# Altium PCB ATRACK_KP_V1.PcbDoc (part 2 of 2)
Units mm, origin at the board's own origin, x right, y up, seen from the top; angles counter-clockwise.
Board outline 132 x 70 mm, 2 copper layers (TopLayer, BottomLayer); 246 components, 174 nets, 752 pads, 172 vias.
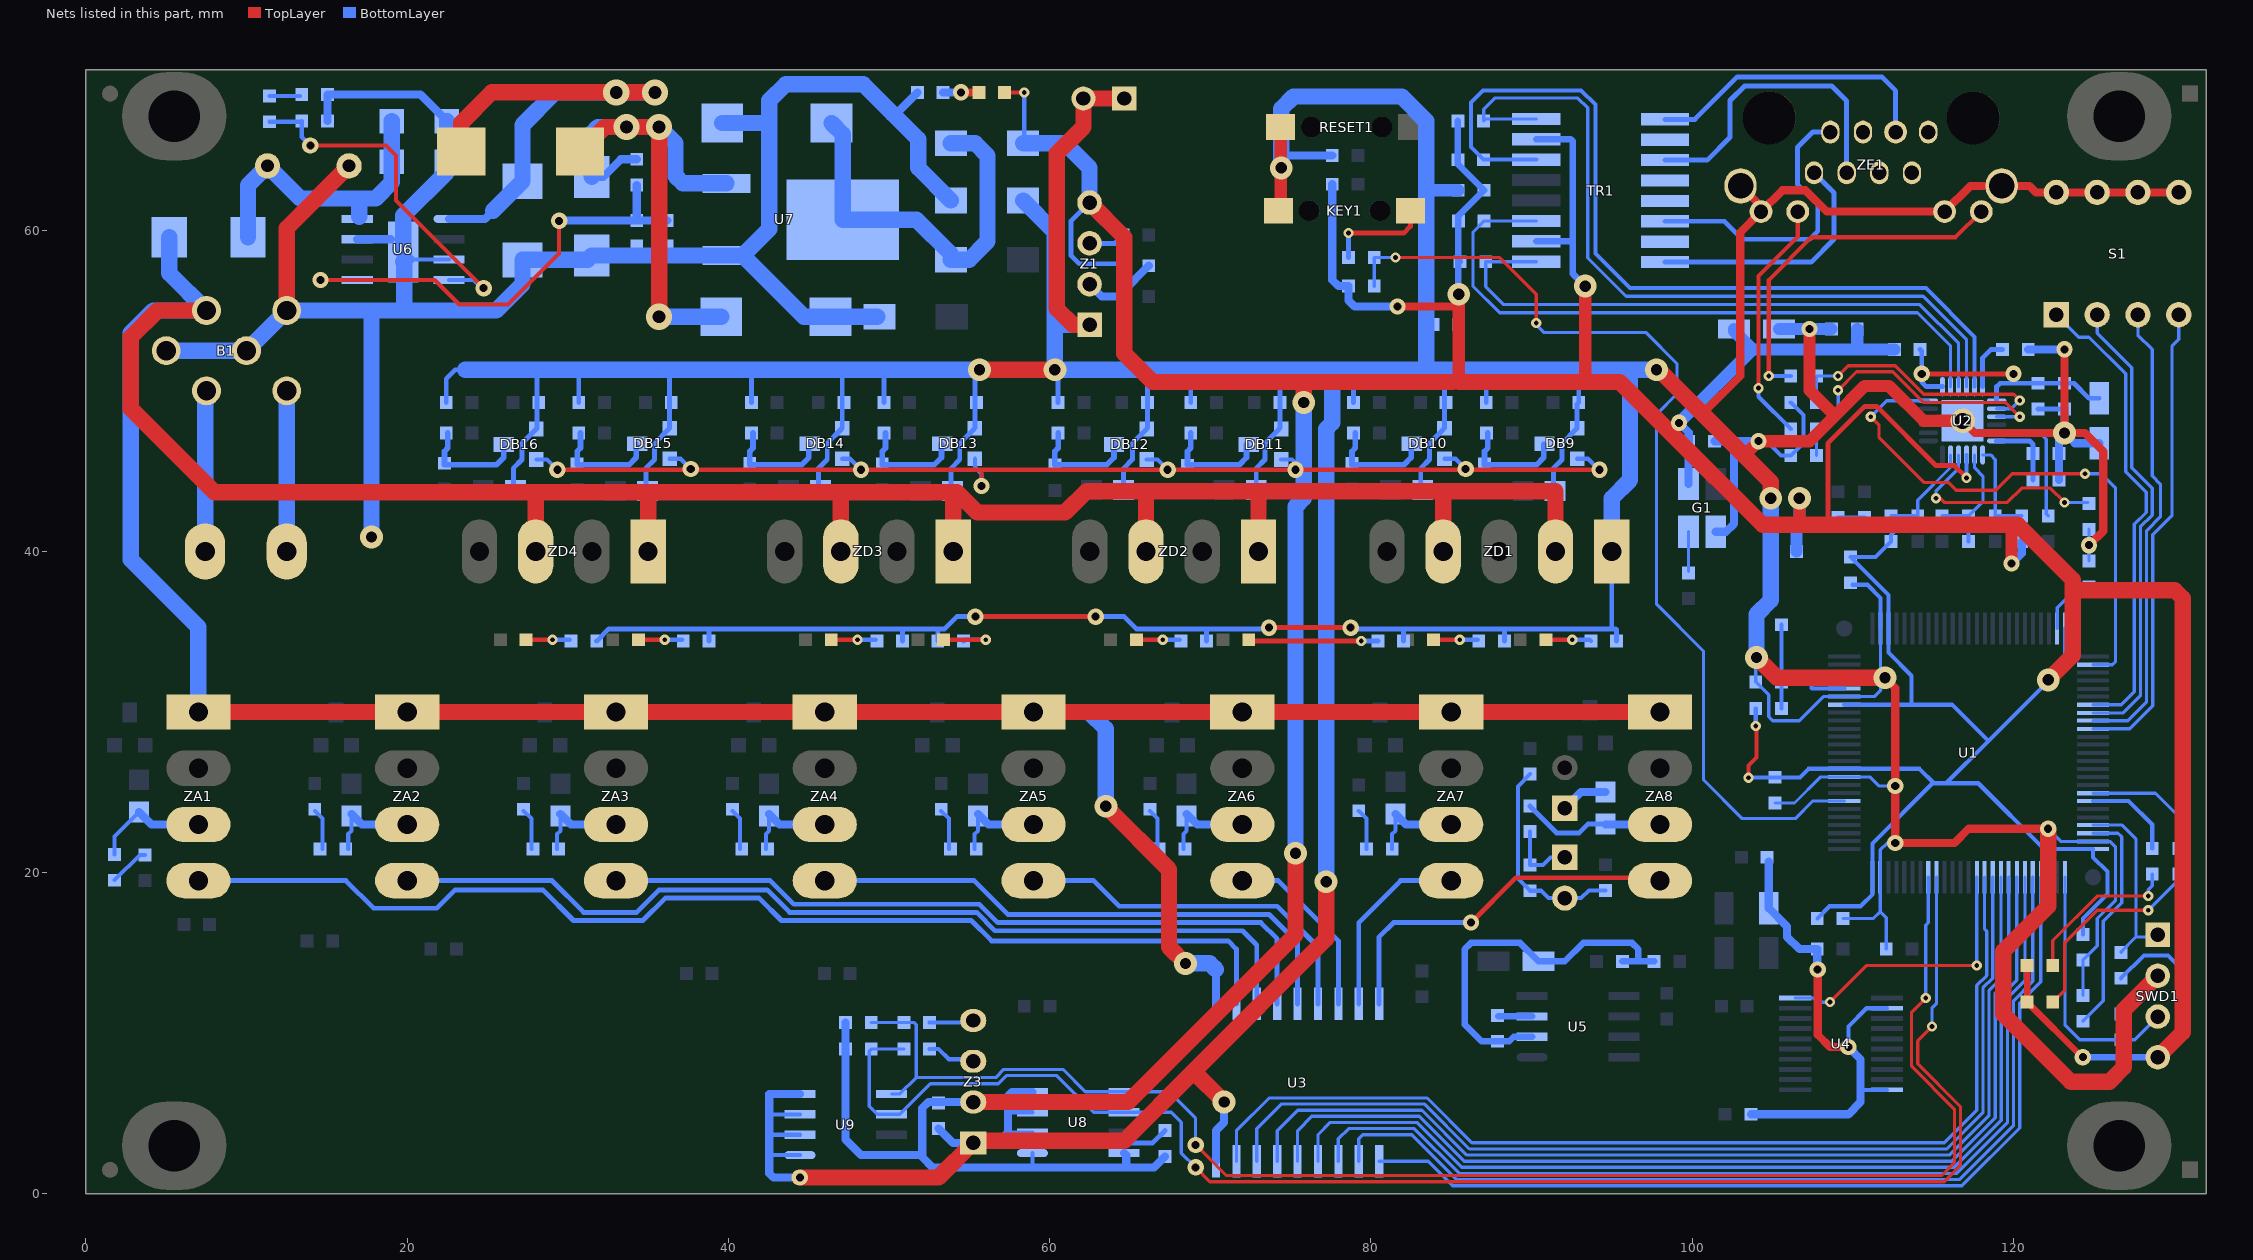
[diagram p2: the nets of this part, all layers, seen from the top]

## Via types
v1: diameter 0.635, hole 0.3, TopLayer to BottomLayer, tented both sides, 84 vias
v2: diameter 1.016, hole 0.5, TopLayer to BottomLayer, tented both sides, 60 vias
v3: diameter 1.422, hole 0.7, TopLayer to BottomLayer, tented both sides, 22 vias
v4: diameter 1.626, hole 0.8, TopLayer to BottomLayer, tented both sides, 5 vias
v5: diameter 1.524, hole 1, TopLayer to BottomLayer, tented both sides, 1 vias

## Nets (pads, with @x,y where several pads share a name; then routed paths per layer and width w, separated by ;. In a path a pad name is that pad's centre, name@x,y a point inside that pad or via, vN(x,y) a via of type N, cw(c..) or ccw(c..) an arc to the next point about the centre after c; other vN are vias at no path point) (continued)
E_TXD1: U1.52 U2.18 | length 34.6
  TopLayer w0.203: v1(111.125,48.387) 111.633,47.879 111.633,47.117 114.465,44.285 115.982,44.285 116.452,43.815 118.91,43.815 119.926,44.831 v1(124.46,44.831)
  BottomLayer w0.203: v1(111.125,48.387) 112.121,49.383 U2.18@114.715,49.383 ; v1(124.46,44.831) 125.476,44.831 126.365,43.942 126.365,33.147 126.162,32.944 U1.52@124.968,32.944
ELED1A: R27.1 ZE1.10 | length 15.4
  TopLayer w0.254: v1(104.14,50.165) 104.14,57.15 106.578,59.588 ZE1.10@106.578,61.158
  BottomLayer w0.254: v1(104.14,50.165) 104.14,49.63 R27.1@106.145,47.625
ELED2A: R28.1 ZE1.12 | length 22.3
  TopLayer w0.254: v1(104.775,50.927) 104.775,56.896 107.442,59.563 116.413,59.563 ZE1.12@118.008,61.158
  BottomLayer w0.254: v1(104.775,50.927) R28.1@106.145,50.927
ERX+: TR1.11 ZE1.3 | length 19.4
  BottomLayer w0.305: TR1.11@98.323,64.364 100.94,64.364 102.362,65.786 102.362,68.072 103.27,68.98 108.693,68.98 109.626,68.047 ZE1.3@109.626,63.571
ERX-: TR1.9 ZE1.6 | length 18.4
  BottomLayer w0.305: TR1.9@98.323,66.904 100.178,66.904 102.817,69.543 111.813,69.543 112.674,68.682 ZE1.6@112.674,66.111
ETH9: TR1.15
ETH10: TR1.10
ETH11: TR1.13
ETH12: TR1.12
ETH13: ZE1.4
ETH14: ZE1.5
ETH15: ZE1.7
ETH16: ZE1.8
ETX+: TR1.16 ZE1.1 | length 15.8
  BottomLayer w0.305: TR1.16@98.323,58.014 107.417,58.014 108.839,59.436 108.839,62.326 ZE1.1@107.594,63.571
ETX-: TR1.14 ZE1.2 | length 18.4
  BottomLayer w0.305: TR1.14@98.323,60.554 102.006,60.554 103.124,59.436 107.315,59.436 107.823,59.944 107.823,61.595 106.553,62.865 106.553,65.151 107.513,66.111 ZE1.2@108.61,66.111
GND: C1.2 C2.2 C3.1 C4.2 C5.1 C6.2 C7.2 C8.2 C9.2 C10.2 C11.2 C12.2 C13.1 C14.1 C15.1 C16.1 C17.1 C18.1 C19.1 C20.1 C21.1 C34.2 C35.2 C36.2 C37.2 C38.2 C39.2 C40.2 C41.2 C50.2 DB9.1 DB10.1 DB11.1 DB12.1 DB13.1 DB14.1 DB15.1 DB16.1 G1.2 GND1.1 GND1.2 KEY1.2 L4.2 R1.2 R5.1 R25.1 R30.1 R31.1 R32.1 R53.2 R54.2 R55.2 R57.2 R58.2 R59.2 R61.2 R62.2 R63.2 R65.2 R66.2 R67.2 R69.2 R70.2 R71.2 R73.2 R74.2 R75.2 R77.2 R78.2 R79.2 R81.2 R82.2 R83.2 RESET1.1 S1.5 S1.6 S1.7 S1.8 SWD1.2 U1.10 U1.20 U1.27 U1.74 U1.99 U2.25 U3.9 U8.2 U8.3 U8.4 U9.1 U9.2 U9.3 U9.4 Z1.1 Z3.1 ZD1.1 ZE1.9 ZE1.11 ZE1.G1 ZE1.G2 | length 688
  TopLayer w0.305: v2(55.372,35.941) v2(62.865,35.941) ; v2(73.66,35.255) 78.689,35.255 78.74,35.306 v2(78.74,35.255)
  TopLayer w0.508: 100.647,48.578 102.997,50.927 102.997,59.863 ZE1.9@104.292,61.158 ; ZE1.G2@103.022,62.758 104.292,61.488 ZE1.9@104.292,61.158 ; v3(112.014,32.131) 112.649,31.496 v2(112.649,25.4) v2(112.649,21.844) 116.332,21.844 117.221,22.733 v2(122.174,22.733) ; v5(116.84,48.133) 117.602,47.371 v3(123.19,47.371) ; v2(123.19,52.578) v3(123.19,47.371) ; v2@124.714,40.513 v2(124.714,40.386) 125.603,41.275 125.603,46.228 124.46,47.371 v3(123.19,47.371) ; S1.5@130.302,62.357 S1.6@127.762,62.357 S1.7@125.222,62.357 S1.8@122.682,62.357 121.412,62.357 121.011,62.758 ZE1.G1@119.278,62.758 117.322,62.758 ZE1.11@115.722,61.158 108.387,61.158 107.061,62.484 105.618,62.484 ZE1.9@104.292,61.158
  TopLayer w0.762: KEY1.2@74.259,61.214 74.386,61.341 RESET1.1@74.386,66.421 ; 103.251,45.974 v2(104.14,46.863) 107.315,46.863 108.902,48.451 ; v2(107.315,53.848) 107.315,50.038 108.902,48.451 ; v5(116.84,48.133) 114.427,48.133 112.268,50.292 110.744,50.292 108.902,48.451
  TopLayer w1.016: v2(44.45,1.016) 53.086,1.016 Z3.1@55.245,3.175 55.372,3.302 64.643,3.302 68.961,7.62 ; v3(55.626,51.308) v3(60.325,51.308) ; Z1.1@62.484,54.102 61.468,54.102 60.452,55.118 60.452,64.77 62.103,66.421 GND1.2@62.103,68.199 GND1.1@64.643,68.199 ; v3(70.866,5.715) 68.961,7.62 ; v3(77.216,19.431) 77.216,15.875 68.961,7.62 ; v3(97.79,51.308) 97.917,51.308 100.647,48.578 103.251,45.974 104.902,44.323 v3(104.902,43.307) ; v3(104.013,33.401) 105.283,32.131 v3(112.014,32.131) ; v2(122.174,22.733) 122.174,17.907 119.38,15.113 119.38,11.176 123.571,6.985 125.984,6.985 126.873,7.874 126.873,11.453 SWD1.2@129,13.58
  BottomLayer w0.203: C2.2@103.964,35.433 C1.2@103.964,31.877 104.775,31.066 104.775,29.718 105.029,29.464 106.68,29.464 108.179,30.963 U1.20@109.474,30.963 111.354,30.963 111.76,31.369 111.735,31.394 U1.27@111.735,35.204 ; C8.2@105.156,24.335 106.377,24.335 108.001,25.959 U1.10@109.474,25.959 111.074,25.959 111.633,25.4 v2(112.649,25.4) ; C7.2@109.396,17.145 111.277,17.145 111.709,17.577 ; R1.2@112.092,15.24 112.092,17.194 111.709,17.577 ; v2(112.649,21.844) 112.141,21.844 111.709,21.412 U1.99@111.709,19.71 111.709,17.577 ; v2(122.174,22.733) 122.961,21.946 U1.74@124.968,21.946 126.011,21.946 126.365,21.591 126.365,18.288 125.222,17.145 125.222,15.445 C6.2@124.333,14.556 C3.1@124.333,12.346 ; C5.1@124.714,39.397 v2(124.714,40.386) R32.1@124.714,41.375 ; R5.1@126.714,11.194 129,13.48 SWD1.2@129,13.58
  BottomLayer w0.254: 42.545,2.413 U9.1@44.45,2.413 ; 42.545,3.81 42.672,3.683 U9.2@44.45,3.683 ; 42.545,5.08 42.672,4.953 U9.3@44.45,4.953 ; 57.404,3.81 U8.2@58.928,3.81 ; 57.404,5.08 U8.3@58.928,5.08 ; v2(104.14,46.863) 104.648,46.863 105.537,45.974 R31.1@106.145,45.974 106.934,46.763 106.934,48.487 R30.1@106.145,49.276 ; C9.2@109.982,37.924 110.92,37.924 111.735,37.109 U1.27@111.735,35.204
  BottomLayer w0.305: C41.2@22.43,49.276 22.43,50.751 22.987,51.308 23.622,51.308 ; R82.2@26.609,43.815 26.609,45.178 27.151,45.72 27.151,46.736 DB16.1@28.04,47.625 ; DB16.1@28.089,47.674 28.089,51.203 ; C40.2@30.685,49.276 30.685,51.259 ; R83.2@31.799,34.417 32.561,35.179 53.086,35.179 ; R78.2@34.864,43.815 34.864,45.178 35.406,45.72 35.406,46.736 DB15.1@36.295,47.625 ; DB15.1@36.344,47.674 36.344,51.203 ; R79.2@38.784,34.417 38.784,35.101 ; C39.2@41.43,49.276 41.43,51.28 ; R74.2@45.609,43.815 45.609,45.178 46.151,45.72 46.151,46.736 DB14.1@47.04,47.625 ; DB14.1@47.089,47.674 47.089,51.28 ; C38.2@49.685,49.276 49.685,51.28 ; R75.2@50.849,34.417 50.849,35.13 ; R71.2@53.037,34.417 53.037,35.13 53.086,35.179 ; R70.2@53.864,43.815 53.864,45.178 54.406,45.72 54.406,46.736 DB13.1@55.295,47.625 ; DB13.1@55.344,47.674 55.344,51.026 v3(55.626,51.308) ; v2(55.372,35.941) 54.229,35.941 53.467,35.179 53.086,35.179 ; 56.769,3.175 66.421,3.175 C50.2@67.183,3.937 ; v3(60.325,51.308) 60.53,51.103 C37.2@60.53,49.276 ; v2(62.865,35.941) 64.643,35.941 65.405,35.179 v2@73.584,35.179 ; R66.2@64.609,43.815 64.609,45.178 65.151,45.72 65.151,46.736 DB12.1@66.04,47.625 ; DB12.1@66.089,47.674 R65.2@66.089,49.276 66.089,51.23 ; C36.2@68.785,49.276 68.785,51.132 ; R67.2@69.772,34.417 69.772,35.101 ; R62.2@72.864,43.815 72.864,45.178 73.406,45.72 73.406,46.736 DB11.1@74.295,47.625 ; DB11.1@74.344,47.674 R61.2@74.344,49.276 74.344,51.23 ; v2@78.74,35.179 94.996,35.179 ; C35.2@78.93,49.276 78.93,51.244 ; R63.2@82.042,34.417 82.042,35.13 ; R58.2@83.109,43.815 83.109,45.178 83.651,45.72 83.651,46.736 DB10.1@84.54,47.625 ; DB10.1@84.589,47.674 84.589,51.301 ; C34.2@87.185,49.276 87.185,51.244 ; R59.2@88.314,34.417 88.314,35.101 ; R54.2@91.364,43.815 91.364,45.178 91.906,45.72 91.906,46.736 DB9.1@92.795,47.625 ; DB9.1@92.844,47.674 92.844,49.176 R53.2@92.944,49.276 92.944,51.288 92.964,51.308 ; ZD1.1@95,40 95,35.183 94.996,35.179 ; R55.2@95.299,34.417 95.299,35.13 95.25,35.179 94.996,35.179 ; C16.1@121.539,48.868 C15.1@123.19,48.868
  BottomLayer w0.508: v2(44.45,1.016) 42.799,1.016 42.545,1.27 42.545,2.413 42.545,3.81 42.545,5.08 42.545,6.223 U9.4@44.45,6.223 ; C11.2@53.086,4.064 53.975,3.175 Z3.1@55.245,3.175 56.769,3.175 57.404,3.81 57.404,5.08 57.404,6.096 57.658,6.35 U8.4@58.928,6.35 ; U3.9@70.358,2.032 70.358,3.937 70.866,4.445 v3(70.866,5.715) ; 74.422,64.643 C4.2@77.597,64.643 ; C12.2@101.395,46.863 102.616,46.863 ; G1.2@101.473,41.224 102.121,41.224 102.616,41.72 102.616,46.863 ; v2(104.14,46.863) 102.616,46.863 ; R25.1@120.931,52.578 v2(123.19,52.578) ; C18.1@122.836,44.45 C20.1@122.836,46.101 122.836,47.017 v3(123.19,47.371) ; C15.1@123.19,48.868 v3(123.19,47.371) ; C17.1@125.349,46.736 123.825,46.736 v3(123.19,47.371)
  BottomLayer w0.762: 83.439,62.484 C14.1@85.444,62.484 ; C21.1@105.41,53.848 v2(107.315,53.848) C19.1@108.685,53.848
  BottomLayer w1.016: 23.622,51.308 v3(55.626,51.308) ; L4.2@58.348,61.849 60.325,59.872 60.325,54.102 ; Z1.1@62.484,54.102 60.325,54.102 ; v3(74.422,63.881) 74.422,64.643 74.422,67.564 75.184,68.326 81.915,68.326 83.439,66.802 83.439,62.484 83.439,51.308 ; v3(77.216,19.431) 77.216,47.625 77.597,48.006 77.597,51.308 ; ZD1.1@95,40 95,43.311 96.139,44.45 96.139,51.308 ; v3(97.79,51.308) 96.139,51.308 ; v3(104.013,33.401) 104.013,36.068 104.902,36.957 C10.2@104.902,40 v3(104.902,43.307) ; 60.325,54.102 v3(60.325,51.308) 77.597,51.308 ; 77.597,51.308 83.439,51.308 ; 83.439,51.308 92.964,51.308 96.139,51.308
GND_Z: B1.CG1 B1.CG2 B1.CG3 C42.1 C44.2 C45.1 C46.1 C47.1 C48.1 C49.1 D2.A L4.1 L6.1 R13.2 R85.2 R86.2 R87.2 U6.3 U6.7 U6.9 U7.1 | length 133.8
  TopLayer w1.016: B1.CG1@12.5,55 12.5,60.125 C42.1@16.383,64.008
  BottomLayer w0.254: U6.9@20.244,58.166 U6.3@22.606,58.166
  BottomLayer w0.508: C44.2@15.035,66.802 R87.2@15.035,68.453 20.819,68.453 C47.1@22.476,66.797 ; U6.7@16.891,59.436 U6.9@18.974,59.436 ; U6.9@19.761,57.353 19.761,58.039 U6.9@19.761,58.649 U6.9@20.244,58.166 ; 50.228,67.247 50.434,67.247 R13.2@51.767,68.58
  BottomLayer w1.016: B1.CG3@5,52.5 B1.CG2@10,52.5 B1.CG1@12.5,55 17.78,55 ; v3(17.78,40.894) 17.78,55 ; U6.9@19.555,58.855 U6.9@19.761,58.649 19.761,60.909 22.476,63.624 C46.1@22.476,64.257 C47.1@22.476,66.797 ; U6.9@19.761,58.039 19.812,57.988 19.812,55 ; D2.A@27.178,58.147 27.178,56.642 25.536,55 19.812,55 ; D2.A@27.178,58.166 31.242,58.166 C45.1@31.496,58.42 36.195,58.42 U7.1@39.878,58.42 U7.1@40.894,58.42 ; C49.1@39.624,66.675 42.545,66.675 ; L6.1@49.276,54.61 C48.1@46.355,54.61 44.704,54.61 U7.1@40.894,58.42 ; L4.1@53.848,61.849 51.816,63.881 51.816,65.659 50.228,67.247 48.387,69.088 43.561,69.088 42.545,68.072 42.545,66.675 ; 17.78,55 19.812,55 ; U7.1@40.894,58.42 42.545,60.071 42.545,66.675
JP1: S1.1 U1.57 | length 29.4
  BottomLayer w0.203: S1.1@122.682,54.737 124.079,53.34 124.714,53.34 127,51.054 127,44.958 128.27,43.688 128.27,42.423 127.533,41.687 127.533,31.267 126.721,30.455 U1.57@124.968,30.455
JP2: S1.2 U1.58 | length 28.8
  BottomLayer w0.203: U1.58@124.968,29.947 126.848,29.947 127.914,31.013 127.914,41.529 128.651,42.266 128.651,43.942 127.381,45.212 127.381,51.435 125.222,53.594 S1.2@125.222,54.737
JP3: S1.3 U1.59 | length 28.9
  BottomLayer w0.203: U1.59@124.968,29.464 127.127,29.464 128.295,30.632 128.295,41.3 129.159,42.164 129.159,44.196 128.651,44.704 128.651,52.578 127.762,53.467 S1.3@127.762,54.737
JP4: S1.4 U1.60 | length 29.3
  BottomLayer w0.203: U1.60@124.968,28.956 127.254,28.956 128.676,30.378 128.676,41.046 129.883,42.253 129.883,52.794 130.302,53.213 S1.4@130.302,54.737
KY1: F1.2 R12.1 U1.7 | length 62.5
  TopLayer w0.203: v1(81.534,58.293) 88.011,58.293 90.297,56.007 v1(90.297,54.229)
  BottomLayer w0.203: R12.1@80.213,56.515 F1.2@80.213,58.293 v1(81.534,58.293) ; v1(90.297,54.229) 90.17,54.229 90.767,53.632 97.117,53.632 99.06,51.689 99.06,49.815 97.79,48.545 97.79,36.703 100.711,33.782 100.711,25.781 103.124,23.368 106.426,23.368 107.518,24.46 U1.7@109.474,24.46
LED1: R10.2 U1.69 | length 5.8
  BottomLayer w0.254: U1.69@124.968,24.46 127.178,24.46 128.651,22.987 R10.2@128.651,21.512
LED2: R11.2 U1.68 | length 7.9
  BottomLayer w0.203: U1.68@124.968,24.943 128.854,24.943 130.302,23.495 R11.2@130.302,21.512
NetB1_B: B1.B Z2.2 | length 9.9
  BottomLayer w1.016: Z2.2@7.42,40 B1.B@7.42,49.92
NetB1_PSG: B1.PSG Z2.1 | length 10
  BottomLayer w1.016: Z2.1@12.5,40 B1.PSG@12.5,50
NetC1_1: C1.1 C2.1 R4.1 U1.21 U1.22 | length 11.7
  BottomLayer w0.254: R4.1@105.564,30.226 C1.1@105.564,31.877 ; C2.1@105.564,35.433 C1.1@105.564,31.877 ; U1.21@109.474,31.471 107.467,31.471 107.442,31.496 107.442,31.877 107.518,31.953 ; U1.22@109.474,31.953 107.518,31.953 ; C1.1@105.564,31.877 105.64,31.953 107.518,31.953
NetC3_2: C3.2 U1.73 | length 14.4
  BottomLayer w0.203: C3.2@124.333,10.746 125.603,12.016 125.603,16.987 126.746,18.13 126.746,22.225 126.517,22.454 U1.73@124.968,22.454
NetC5_2: C5.2 U1.49 | length 3.8
  BottomLayer w0.203: U1.49@122.733,35.204 122.733,36.5 124.03,37.797 C5.2@124.714,37.797
NetC15_2: C15.2 C16.2 C17.2 L1.1 U2.1 U2.19 | length 17.5
  TopLayer w0.305: v2(114.3,51.054) v2(120.015,51.054)
  BottomLayer w0.305: L1.1@114.2,52.578 114.3,52.478 v2(114.3,51.054) 114.3,50.546 114.588,50.258 U2.19@115.59,50.258 ; U2.1@118.965,49.383 118.965,50.258 119.175,50.468 120.015,50.468 ; v2(120.015,51.054) 120.015,50.468 ; C17.2@125.349,49.536 124.708,49.536 123.776,50.468 C15.2@123.19,50.468 C16.2@121.539,50.468 120.015,50.468
NetC18_2: C18.2 C20.2 U2.6 | length 4.6
  BottomLayer w0.305: U2.6@118.965,46.883 121.011,46.883 121.236,46.658 C20.2@121.236,46.101 C18.2@121.236,44.45
NetC25_1: C25.1 C26.1 CX1.2 F6.1 U4.12 U4.20 | length 31.6
  TopLayer w0.508: v2(107.823,13.97) 107.823,9.906 108.585,9.144 v2(109.728,9.144)
  BottomLayer w0.254: v2(109.728,9.144) 109.728,10.414 110.871,11.557 U4.12@112.141,11.557 ; 110.49,6.477 U4.20@112.141,6.477
  BottomLayer w0.508: C25.1@103.659,4.953 109.728,4.953 110.49,5.715 110.49,6.477 110.49,8.382 v2(109.728,9.144) ; F6.1@104.775,20.674 CX1.2@104.775,17.786 105.918,16.643 105.918,16.002 106.68,15.24 C26.1@107.796,15.24 107.796,13.997 v2(107.823,13.97)
NetC30_1: C30.1 CX2.2 F10.1 R47.1 U5.2 | length 24.2
  BottomLayer w0.406: U5.2@90.043,9.779 88.9,9.779 88.619,9.498 86.895,9.498 85.852,10.541 85.852,15.24 86.233,15.621 89.287,15.621 CX2.2@90.43,14.478 92.075,14.478 93.218,15.621 96.266,15.621 96.647,15.24 96.647,14.478 ; C30.1@95.658,14.478 96.647,14.478 ; F10.1@97.636,14.478 96.647,14.478
NetC42_2: C42.2 C46.2 C47.2 D1.K U6.8 | length 18.9
  BottomLayer w1.016: D1.K@10.088,59.563 10.088,62.793 C42.2@11.303,64.008 13.335,61.976 17.018,61.976 ; U6.8@17.018,60.833 17.018,61.976 ; C47.2@19.047,66.797 C46.2@19.047,64.257 19.047,62.989 18.034,61.976 17.018,61.976
NetC43_1: C43.1 R87.1 | length 1.9
  BottomLayer w0.254: C43.1@11.43,68.353 R87.1@13.335,68.353
NetC43_2: C43.2 C44.1 U6.4 | length 22.8
  TopLayer w0.254: v2(13.97,65.278) 18.669,65.278 19.304,64.643 19.304,61.849 v2(24.765,56.388) v2@24.765,56.769
  BottomLayer w0.254: C43.2@11.43,66.753 13.386,66.753 C44.1@13.435,66.802 13.435,65.813 v2(13.97,65.278) ; U6.4@22.606,56.896 24.13,56.896 24.765,56.261 v2(24.765,56.388)
NetC49_2: C49.2 L3.1 L5.1 U7.2 | length 24.6
  BottomLayer w1.016: C49.2@46.424,66.675 47.117,65.982 U7.2@47.117,60.655 51.717,60.655 L5.1@53.811,58.56 ; L5.1@53.848,58.166 54.991,58.166 56.134,59.309 56.134,64.643 55.372,65.405 L3.1@53.848,65.405
NetD2_K: D2.K L2.1 U6.1 | length 32.8
  TopLayer w1.016: L2.1@23.368,64.897 23.368,66.675 25.273,68.58 v4(35.433,68.58)
  BottomLayer w0.508: U6.1@22.606,60.706 24.837,60.706 25.345,61.214
  BottomLayer w1.016: 25.345,61.214 D2.K@27.178,63.047 27.178,66.548 29.21,68.58 v4(35.433,68.58)
  other v4: 33.02,68.58
NetDB9_3: DB9.3 F12.2 R52.2 | length 6.8
  BottomLayer w0.356: F12.2@87.285,47.371 87.285,46.433 87.08,46.228 87.08,45.388 90.304,45.388 90.763,45.847 DB9.3@90.763,46.66
NetDB10_3: DB10.3 F13.2 R56.2 | length 6.8
  BottomLayer w0.356: F13.2@79.03,47.371 79.03,46.433 78.825,46.228 78.825,45.388 82.049,45.388 82.508,45.847 DB10.3@82.508,46.66
NetDB11_3: DB11.3 F14.2 R60.2 | length 6.8
  BottomLayer w0.356: F14.2@68.785,47.371 68.785,46.433 68.58,46.228 68.58,45.388 71.804,45.388 72.263,45.847 DB11.3@72.263,46.66
NetDB12_3: DB12.3 F15.2 R64.2 | length 6.8
  BottomLayer w0.356: F15.2@60.53,47.371 60.53,46.433 60.325,46.228 R64.2@60.325,45.388 63.549,45.388 64.008,45.847 DB12.3@64.008,46.66
NetDB13_3: DB13.3 F16.2 R68.2 | length 6.8
  BottomLayer w0.356: F16.2@49.785,47.371 49.785,46.433 49.58,46.228 49.58,45.388 52.804,45.388 53.263,45.847 DB13.3@53.263,46.66
NetDB14_3: DB14.3 F17.2 R72.2 | length 6.8
  BottomLayer w0.356: F17.2@41.53,47.371 41.53,46.433 41.325,46.228 41.325,45.388 44.549,45.388 45.008,45.847 DB14.3@45.008,46.66
NetDB15_3: DB15.3 F18.2 R76.2 | length 6.8
  BottomLayer w0.356: F18.2@30.785,47.371 30.785,46.433 30.58,46.228 30.58,45.388 33.804,45.388 34.263,45.847 DB15.3@34.263,46.66
NetDB16_3: DB16.3 F19.2 R80.2 | length 6.8
  BottomLayer w0.356: F19.2@22.53,47.371 22.53,46.433 22.325,46.228 22.325,45.388 25.549,45.388 26.008,45.847 DB16.3@26.008,46.66
NetDL1_K: DL1.K R83.1 | length 2.7
  TopLayer w0.305: DL1.K@27.4,34.5 v1(29.039,34.5)
  BottomLayer w0.305: v1(29.039,34.5) R83.1@30.116,34.5
NetDL2_K: DL2.K R79.1 | length 2.7
  TopLayer w0.305: DL2.K@34.4,34.5 v1(36.039,34.5)
  BottomLayer w0.305: v1(36.039,34.5) R79.1@37.101,34.5
NetDL3_K: DL3.K R75.1 | length 2.8
  TopLayer w0.305: DL3.K@46.4,34.5 v1(48.039,34.5)
  BottomLayer w0.305: v1(48.039,34.5) R75.1@49.166,34.5
NetDL4_K: DL4.K R71.1 | length 4
  TopLayer w0.305: DL4.K@53.4,34.5 v1(56.024,34.5)
  BottomLayer w0.305: R71.1@54.637,34.417 54.72,34.5 v1(56.024,34.5)
NetDL5_K: DL5.K R67.1 | length 2.7
  TopLayer w0.305: DL5.K@65.4,34.5 v1(67.039,34.5)
  BottomLayer w0.305: v1(67.039,34.5) R67.1@68.089,34.5
NetDL6_K: DL6.K R63.1 | length 8.1
  TopLayer w0.305: DL6.K@72.4,34.5 72.483,34.417 v1(79.407,34.417)
  BottomLayer w0.305: v1(79.407,34.417) R63.1@80.442,34.417
NetDL7_K: DL7.K R59.1 | length 2.7
  TopLayer w0.305: DL7.K@83.9,34.5 v1(85.539,34.5)
  BottomLayer w0.305: v1(85.539,34.5) R59.1@86.631,34.5
NetDL8_K: DL8.K R55.1 | length 2.8
  TopLayer w0.305: DL8.K@90.9,34.5 v1(92.539,34.5)
  BottomLayer w0.254: v1(92.539,34.5) 93.616,34.5 R55.1@93.699,34.417
NetF1_1: F1.1 KEY1.1 | length 6.5
  TopLayer w0.305: v1(78.613,59.817) 82.042,59.817 82.459,60.234 KEY1.1@82.459,61.214
  BottomLayer w0.305: F1.1@78.613,58.293 v1(78.613,59.817)
NetF2_1: F2.1 R33.1 | length 2.6
  BottomLayer w0.254: F2.1@1.778,19.531 3.356,21.109 R33.1@3.683,21.109
NetF3_1: F3.1 R35.1 | length 2.6
  BottomLayer w0.254: R35.1@14.248,23.849 14.729,23.368 F3.1@14.729,21.463
NetF4_1: F4.1 R37.1 | length 2.6
  BottomLayer w0.254: R37.1@27.248,23.849 27.729,23.368 F4.1@27.729,21.463
NetF5_1: F5.1 R39.1 | length 2.6
  BottomLayer w0.254: R39.1@40.248,23.849 40.729,23.368 F5.1@40.729,21.463
NetF7_1: F7.1 R41.1 | length 2.6
  BottomLayer w0.254: R41.1@53.248,23.849 53.729,23.368 F7.1@53.729,21.463
NetF8_1: F8.1 R43.1 | length 2.6
  BottomLayer w0.254: R43.1@66.248,23.849 66.729,23.368 F8.1@66.729,21.463
NetF9_1: F9.1 R45.1 | length 2.6
  BottomLayer w0.254: R45.1@79.248,23.849 79.729,23.368 F9.1@79.729,21.463
NetF11_1: F11.1 JP1.1 R48.1 | length 4.4
  BottomLayer w0.254: F11.1@89.916,22.552 R48.1@89.916,20.474 90.705,20.474 91.186,20.955 JP1.1@92.075,20.955
NetF20_1: F20.1 Z3.3 | length 3
  BottomLayer w0.254: F20.1@52.527,9.017 53.086,9.017 53.721,8.382 55.118,8.382 Z3.3@55.245,8.255
NetF21_1: F21.1 Z3.4 | length 2.8
  BottomLayer w0.254: F21.1@52.527,10.668 55.118,10.668 Z3.4@55.245,10.795
NetG1_3: G1.3 R2.1 | length 2.5
  BottomLayer w0.203: R2.1@99.771,38.762 G1.3@99.771,41.224
NetJP1_2: JP1.2 R48.2 R49.1 R50.1 | length 13
  BottomLayer w0.254: R50.1@89.916,26.135 89.154,25.373 89.154,19.636 R48.2@89.916,18.874 ; R48.2@89.938,18.896 R48.2@89.916,18.874 ; R49.1@94.615,18.896 93.572,18.896 93.091,18.415 JP1.2@92.075,18.415 91.059,18.415 90.6,18.874 R48.2@89.916,18.874
NetJP2_1: JP2.1 R51.1 | length 3
  BottomLayer w0.508: JP2.1@92.075,24.003 93.093,25.021 R51.1@94.615,25.021
NetLD1_K: LD1.K R10.1 | length 10.1
  TopLayer w0.203: LD1.K@122.455,14.224 122.455,15.775 125.222,18.542 v1(128.397,18.542)
  BottomLayer w0.203: v1(128.397,18.542) 128.397,18.923 128.651,19.177 R10.1@128.651,19.912
NetLD2_K: LD2.K R11.1 | length 13.1
  TopLayer w0.203: LD2.K@122.455,11.938 123.19,12.673 123.19,15.621 125.222,17.653 v1(128.397,17.653)
  BottomLayer w0.203: v1(128.397,17.653) 130.302,19.558 R11.1@130.302,19.912
NetLD3_K: LD3.K R13.1 | length 2.2
  TopLayer w0.508: v2(54.483,68.58) LD3.K@55.599,68.58
  BottomLayer w0.508: R13.1@53.367,68.58 v2(54.483,68.58)
NetR6_1: R6.1 Z1.3 | length 2.3
  BottomLayer w0.305: Z1.3@62.484,59.182 64.059,59.182 R6.1@64.567,59.69
NetR7_1: R7.1 R92.1 Z1.2 | length 5
  BottomLayer w0.508: Z1.2@62.484,56.642 63.246,55.88 R7.1@64.567,55.88 64.567,56.185 R92.1@66.167,57.785
NetR17_2: R17.2 R23.2 U2.8 | length 6
  BottomLayer w0.203: R23.2@115.57,42.213 R17.2@117.221,42.213 118.11,43.102 118.11,44.692 117.59,45.212 U2.8@117.59,46.008
NetR18_2: R18.2 R26.2 U2.11 | length 6.3
  BottomLayer w0.203: R18.2@112.395,42.213 R26.2@114.046,42.213 ; R26.2@114.043,42.216 R26.2@114.046,42.213 ; U2.11@116.09,46.008 116.09,45.224 114.046,43.18 R26.2@114.046,42.213
NetR20_2: R20.2 R24.2 U2.7 | length 6.1
  BottomLayer w0.203: U2.7@118.09,46.008 118.584,46.008 118.872,45.72 R24.2@118.872,42.213 R20.2@120.523,42.213
NetR25_2: R25.2 U2.24 | length 3.3
  BottomLayer w0.305: U2.24@118.09,50.258 118.09,52.05 118.618,52.578 R25.2@119.331,52.578
NetR27_2: R27.2 R31.2 U2.3 | length 19
  TopLayer w0.203: v1(109.093,50.038) 110.236,51.181 112.491,51.181 114.396,49.276 119.507,49.276 v1(120.396,48.387)
  BottomLayer w0.203: R31.2@107.745,45.974 R27.2@107.745,47.625 109.093,48.973 v1(109.093,50.038) ; U2.3@118.965,48.383 120.392,48.383 v1(120.396,48.387)
NetR28_2: R28.2 R30.2 U2.2 | length 17.1
  TopLayer w0.203: v1(109.093,50.927) 109.728,51.562 112.649,51.562 114.427,49.784 120.015,49.784 v1(120.396,49.403)
  BottomLayer w0.203: R30.2@107.745,49.276 R28.2@107.745,50.927 v1(109.093,50.927) ; U2.2@118.965,48.883 119.876,48.883 v1(120.396,49.403)
NetR29_2: R29.2 U2.5 | length 8.1
  BottomLayer w0.203: U2.5@118.965,47.383 121.654,47.383 122.047,46.99 122.047,42.34 R29.2@122.174,42.213
NetR32_2: R32.2 U2.10 | length 13.6
  TopLayer w0.203: v1(115.189,43.307) 115.443,43.307 115.697,43.053 119.634,43.053 120.523,43.942 122.301,43.942 v1(123.19,43.053)
  BottomLayer w0.203: v1(115.189,43.307) 115.189,43.784 116.59,45.185 U2.10@116.59,46.008 ; v1(123.19,43.053) R32.2@124.636,43.053
NetR47_2: R47.2 U5.3 | length 2.1
  BottomLayer w0.406: R47.2@87.933,11.049 U5.3@90.043,11.049
NetR84_2: R84.2 R85.1 R86.1 U6.5 | length 30.1
  TopLayer w0.254: v2(14.605,56.896) 21.717,56.896 23.241,55.372 26.289,55.372 29.464,58.547 v2(29.464,60.579)
  BottomLayer w0.254: v2(14.605,56.896) U6.5@16.891,56.896
  BottomLayer w0.508: v2(29.464,60.579) 29.491,60.606 R86.1@34.29,60.606 ; R84.2@34.29,62.816 R86.1@34.29,60.606 ; R85.1@36.195,60.606 R86.1@34.29,60.606
PL1: U1.86 U3.8 | length 65.7
  BottomLayer w0.203: U3.8@71.628,2.032 71.628,3.937 73.66,5.969 83.501,5.969 86.295,3.175 115.697,3.175 117.729,5.207 117.729,12.979 118.339,13.589 118.339,16.358 118.212,16.485 U1.86@118.212,19.71
PL2: U1.85 U3.7 | length 64.9
  BottomLayer w0.203: U3.7@72.898,2.032 72.898,4.064 74.422,5.588 83.343,5.588 86.137,2.794 115.855,2.794 118.11,5.049 118.11,12.822 118.72,13.431 U1.85@118.72,19.71
PL3: U1.84 U3.6 | length 64.1
  BottomLayer w0.203: U3.6@74.168,2.032 74.168,3.937 75.438,5.207 83.185,5.207 85.979,2.413 116.013,2.413 118.491,4.891 118.491,12.664 119.228,13.4 U1.84@119.228,19.71
PL4: U1.83 U3.5 | length 63.3
  BottomLayer w0.203: U3.5@75.438,2.032 75.438,3.937 76.327,4.826 83.023,4.826 85.817,2.032 116.17,2.032 118.872,4.734 118.872,12.506 119.71,13.344 U1.83@119.71,19.71
PL5: U1.82 U3.4 | length 62.4
  BottomLayer w0.203: U3.4@76.708,2.032 76.708,3.683 77.47,4.445 82.866,4.445 85.66,1.651 116.328,1.651 119.253,4.576 119.253,12.348 120.218,13.313 U1.82@120.218,19.71
PL6: U1.81 U3.3 | length 61.5
  BottomLayer w0.203: U3.3@77.978,2.032 77.978,3.429 78.613,4.064 82.708,4.064 85.502,1.27 116.486,1.27 119.634,4.418 119.634,12.19 120.726,13.283 U1.81@120.726,19.71
PL7: U1.80 U3.2 | length 60.8
  BottomLayer w0.203: U3.2@79.248,2.032 79.248,3.429 79.502,3.683 82.55,3.683 85.344,0.889 116.644,0.889 120.015,4.26 120.015,12.033 121.209,13.226 U1.80@121.209,19.71
PL8: U1.79 U3.1 | length 58.2
  BottomLayer w0.203: U3.1@80.518,2.032 83.566,2.032 85.09,0.508 116.802,0.508 120.396,4.102 120.396,11.875 121.717,13.195 U1.79@121.717,19.71
RD_N: R14.1 TR1.8 U2.22 | length 49
  BottomLayer w0.203: TR1.8@90.297,66.929 87.149,66.929 R14.1@87.022,66.802 87.022,67.544 87.703,68.224 92.891,68.224 93.497,67.618 93.497,58.268 95.885,55.88 114.38,55.88 117.09,53.169 U2.22@117.09,50.258
RD_P: R21.1 TR1.6 U2.23 | length 53.7
  BottomLayer w0.254: TR1.6@90.297,64.389 R21.1@87.022,64.389 86.233,65.178 86.233,67.945 86.995,68.707 93.091,68.707 93.98,67.818 93.98,58.547 96.139,56.388 114.554,56.388 117.59,53.352 U2.23@117.59,50.258
SCL: F20.2 R91.2 U1.92 U8.6 U9.6 | length 98.6
  TopLayer w0.203: v2(69.088,1.651) 69.977,0.762 115.697,0.762 116.713,1.778 116.713,5.43 114.046,8.097 114.046,9.525 v1(114.935,10.414)
  BottomLayer w0.203: F20.2@50.927,9.017 R91.2@48.895,9.017 48.768,8.89 48.768,5.461 49.276,4.953 U9.6@50.165,4.953 50.673,4.953 52.578,6.858 56.8,6.858 57.308,7.366 60.452,7.366 62.738,5.08 U8.6@64.643,5.08 67.564,5.08 68.199,4.445 68.199,2.54 v2(69.088,1.651) ; v1(114.935,10.414) 114.935,11.557 115.214,11.836 U1.92@115.214,19.71
SDA: F21.2 R90.2 U1.93 U8.5 U9.5 | length 96.3
  TopLayer w0.203: v2(69.088,3.048) 70.993,1.143 115.539,1.143 116.332,1.936 116.332,5.272 113.665,7.939 113.665,11.303 v1(114.554,12.192)
  BottomLayer w0.203: R90.2@48.895,10.668 F21.2@50.927,10.668 51.562,10.668 51.689,10.541 51.689,7.239 ; U9.5@50.165,6.223 50.673,6.223 51.689,7.239 ; v2(69.088,3.048) 69.088,4.699 67.437,6.35 U8.5@64.643,6.35 62.23,6.35 60.833,7.747 57.15,7.747 56.642,7.239 51.689,7.239 ; v1(114.554,12.192) 114.554,16.739 114.706,16.891 U1.93@114.706,19.71
SHDN: U1.87 U4.10 | length 17.8
  TopLayer w0.203: v1(108.585,11.938) 110.871,14.224 v1(117.729,14.224)
  BottomLayer w0.203: U4.10@106.426,12.192 107.569,12.192 107.823,11.938 v1(108.585,11.938) ; v1(117.729,14.224) U1.87@117.729,19.71
SWCLK: R5.2 SWD1.3 U1.76 | length 16
  BottomLayer w0.203: U1.76@123.215,19.71 123.215,10.516 124.137,9.594 R5.2@126.714,9.594 127.554,9.594 SWD1.3@129,11.04
SWDIO: R3.2 SWD1.1 U1.72 | length 11.9
  BottomLayer w0.203: U1.72@124.968,22.962 126.771,22.962 127.635,22.098 127.635,16 ; R3.2@126.714,15.026 126.714,15.072 127.635,15.993 127.635,16 ; SWD1.1@129,16.12 128.88,16 127.635,16
TD_N: R15.1 TR1.3 U2.20 | length 41.4
  BottomLayer w0.203: TR1.3@90.297,60.579 87.058,60.579 R15.1@87.053,60.574 86.36,59.881 86.36,56.515 88.011,54.864 114.034,54.864 116.09,52.808 U2.20@116.09,50.258
TD_P: R22.1 TR1.1 U2.21 | length 38.3
  BottomLayer w0.203: TR1.1@90.297,58.039 R22.1@87.149,58.039 87.149,56.488 88.265,55.372 114.173,55.372 116.59,52.955 U2.21@116.59,50.258
TST1: U3.11 ZA1.4 | length 71.9
  BottomLayer w0.305: ZA1.4@7,19.5 16.187,19.5 17.907,17.78 21.844,17.78 22.987,18.923 28.448,18.923 30.353,17.018 34.671,17.018 36.068,18.415 41.91,18.415 43.307,17.018 55.118,17.018 56.388,15.748 71.12,15.748 71.628,15.24 U3.11@71.628,11.832
TST2: U3.12 ZA2.4 | length 59.4
  BottomLayer w0.305: ZA2.4@20,19.5 29.014,19.5 30.988,17.526 34.29,17.526 35.687,18.923 42.418,18.923 43.815,17.526 55.452,17.526 56.595,16.383 72.009,16.383 72.898,15.494 U3.12@72.898,11.832
TST3: U3.13 ZA3.4 | length 46.7
  BottomLayer w0.305: ZA3.4@33,19.5 42.603,19.5 44.069,18.034 55.626,18.034 56.769,16.891 73.152,16.891 74.168,15.875 U3.13@74.168,11.832
TST4: U3.14 ZA4.4 | length 34.8
  BottomLayer w0.305: ZA4.4@46,19.5 55.303,19.5 57.404,17.399 73.66,17.399 75.438,15.621 U3.14@75.438,11.832
TST5: U3.15 ZA5.4 | length 23
  BottomLayer w0.305: ZA5.4@59,19.5 62.738,19.5 64.331,17.907 74.168,17.907 76.708,15.367 U3.15@76.708,11.832
TST6: U3.16 ZA6.4 | length 11.4
  BottomLayer w0.305: ZA6.4@72,19.5 74.226,19.5 77.978,15.748 U3.16@77.978,11.832
TST7: U3.17 ZA7.4 | length 11.9
  BottomLayer w0.305: U3.17@79.248,11.832 79.248,16.891 81.857,19.5 ZA7.4@85,19.5
TST8: U3.18 ZA8.4 | length 23.3
  TopLayer w0.305: v2(86.233,16.891) 89.027,19.685 97.815,19.685 ZA8.4@98,19.5
  BottomLayer w0.254: v2@86.106,16.891 v2(86.233,16.891)
  BottomLayer w0.305: U3.18@80.518,11.832 80.518,16.002 81.407,16.891 v2@86.106,16.891
VA1: F2.2 R34.2 ZA1.3 | length 7.3
  BottomLayer w0.254: F2.2@1.778,21.131 1.778,22.259 R34.2@3.302,23.783
  BottomLayer w0.508: R34.2@3.302,23.783 4.085,23 ZA1.3@7,23
VA2: F3.2 R36.2 ZA2.3 | length 6
  BottomLayer w0.254: F3.2@16.329,21.463 16.329,22.401 16.534,22.606 R36.2@16.534,23.656
  BottomLayer w0.508: R36.2@16.534,23.656 17.19,23 ZA2.3@20,23
VA3: F4.2 R38.2 ZA3.3 | length 6
  BottomLayer w0.254: F4.2@29.329,21.463 29.329,22.401 29.534,22.606 R38.2@29.534,23.656
  BottomLayer w0.508: R38.2@29.534,23.656 30.19,23 ZA3.3@33,23
VA4: F5.2 R40.2 ZA4.3 | length 6
  BottomLayer w0.254: F5.2@42.329,21.463 42.329,22.401 42.534,22.606 R40.2@42.534,23.656
  BottomLayer w0.508: R40.2@42.534,23.656 43.19,23 ZA4.3@46,23
VA5: F7.2 R42.2 ZA5.3 | length 6
  BottomLayer w0.254: F7.2@55.329,21.463 55.329,22.401 55.534,22.606 R42.2@55.534,23.656
  BottomLayer w0.508: R42.2@55.534,23.656 56.19,23 ZA5.3@59,23
VA6: F8.2 R44.2 ZA6.3 | length 6
  BottomLayer w0.254: F8.2@68.329,21.463 68.329,22.401 68.534,22.606 R44.2@68.534,23.656
  BottomLayer w0.508: R44.2@68.534,23.656 69.19,23 ZA6.3@72,23
VA7: F9.2 R46.2 ZA7.3 | length 6
  BottomLayer w0.254: F9.2@81.329,21.463 81.329,22.401 81.534,22.606 R46.2@81.534,23.656
  BottomLayer w0.508: R46.2@81.534,23.656 82.19,23 ZA7.3@85,23
VA8: F11.2 R51.2 ZA8.3 | length 9
  BottomLayer w0.305: F11.2@89.916,24.152 89.916,24.12 91.557,22.479 92.964,22.479 93.506,23.021 R51.2@94.615,23.021
  BottomLayer w0.508: R51.2@94.615,23 ZA8.3@98,23
VC3: C6.1 C7.1 C8.1 C9.1 C10.1 C11.1 C12.1 C13.2 C14.2 C19.2 C21.2 C50.1 DB9.2 DB10.2 DB11.2 DB12.2 DB13.2 DB14.2 DB15.2 DB16.2 G1.4 L1.2 L3.2 LD1.A LD2.A LD3.A R3.1 R4.2 R9.1 R12.2 R14.2 R15.2 R16.2 R17.1 R18.1 R19.2 R20.1 R21.2 R22.2 R90.1 R91.1 R92.2 SWD1.4 TR1.2 TR1.7 U1.11 U1.19 U1.28 U1.50 U1.75 U1.100 U2.9 U8.1 U8.8 U9.8 Z1.4 Z3.2 | length 535.6
  TopLayer w0.254: v2(29.352,45.085) v2(48.26,45.085) 55.753,45.085 ; v2(55.753,44.069) 55.753,45.085 ; LD3.A@57.199,68.58 v1(58.42,68.58) ; v2(94.234,45.085) v2(75.311,45.085) v2(67.352,45.085) 55.753,45.085 ; v1(103.505,25.908) 103.505,26.67 104.013,27.178 104.013,29.083 v1(103.964,29.132)
  TopLayer w0.305: 108.458,41.656 108.458,46.736 110.757,49.035 111.493,49.035 115.189,45.339 116.332,45.339 v1(117.09,44.581)
  TopLayer w0.406: LD1.A@120.855,14.224 LD2.A@120.855,11.938 v2@124.293,8.5
  TopLayer w0.508: v2(81.661,55.245) 85.471,55.245
  TopLayer w0.762: 85.471,50.546 85.471,55.245 v3(85.471,56.007) ; 93.345,50.546 v3(93.345,56.515) ; 98.614,47.433 v2(99.187,48.006) ; 106.68,41.656 v3(106.68,43.307) ; v2(119.888,39.243) 119.888,41.656
  TopLayer w1.016: Z3.2@55.245,5.715 64.897,5.715 75.311,16.129 v3(75.311,21.209) ; Z1.4@62.484,61.722 64.643,59.563 64.643,52.324 66.421,50.546 75.819,50.546 ; v3(75.819,49.276) 75.819,50.546 ; 85.09,50.546 75.819,50.546 ; 85.471,50.546 93.345,50.546 95.502,50.546 98.614,47.433 104.392,41.656 106.68,41.656 108.458,41.656 119.888,41.656 120.269,41.656 123.698,38.227 123.698,37.592 ; v3(122.174,32.004) 123.698,33.528 123.698,37.592 ; SWD1.4@129,8.5 130.556,10.056 130.556,37.084 130.048,37.592 123.698,37.592
  BottomLayer w0.254: DB16.2@28.04,45.72 28.717,45.72 v2(29.352,45.085) ; DB15.2@36.344,45.769 37.021,45.769 v2(37.656,45.134) ; DB14.2@47.089,45.769 47.576,45.769 v2(48.26,45.085) ; DB13.2@55.344,45.769 55.344,45.24 55.753,44.831 v2(55.753,44.069) ; L3.2@58.348,65.405 58.42,65.477 v1(58.42,68.58) ; 58.928,1.651 U8.1@58.928,2.54 ; DB12.2@66.04,45.72 66.717,45.72 v2(67.352,45.085) ; DB11.2@74.422,45.72 75.099,45.72 75.311,45.508 v2(75.311,45.085) ; DB10.2@84.589,45.769 85.266,45.769 v2(85.901,45.134) ; DB9.2@92.844,45.769 93.521,45.769 v2@94.156,45.134 ; v1(103.505,25.908) 103.532,25.935 C8.1@105.156,25.935 106.707,25.935 107.239,26.467 U1.11@109.474,26.467 114.16,26.467 115.062,25.565 ; v1(103.964,29.132) R4.2@103.964,30.226 ; C7.1@107.796,17.145 108.558,17.907 110.49,17.907 111.227,18.644 U1.100@111.227,19.71 111.227,21.819 114.973,25.565 115.062,25.565 ; R19.2@109.093,42.115 R16.2@110.744,42.115 111.457,41.402 112.776,41.402 ; U1.19@109.474,30.455 113.665,30.455 ; C9.1@109.855,39.651 111.43,39.651 112.395,40.616 112.395,41.021 112.776,41.402 ; C9.1@109.982,39.524 112.217,37.289 U1.28@112.217,35.204 112.217,33.706 113.665,32.258 113.665,30.455 ; v1(117.09,44.581) U2.9@117.09,46.008 ; R17.1@117.221,40.613 117.221,41.402 ; R20.1@120.523,40.613 120.523,41.402 117.221,41.402 ; U1.50@123.215,35.204 123.215,32.956 118.453,28.194 ; C6.1@124.333,16.156 124.333,17.145 125.857,18.669 125.857,20.066 124.968,20.955 U1.75@124.968,21.463 121.92,21.463 117.818,25.565 115.824,25.565 ; R3.1@126.714,13.426 128.138,14.85 129.635,14.85 130.27,14.215 130.27,9.77 SWD1.4@129,8.5 ; 112.776,41.402 117.221,41.402 ; 113.665,30.455 116.192,30.455 118.453,28.194 ; 115.062,25.565 115.824,25.565 ; 115.824,25.565 118.453,28.194
  BottomLayer w0.305: Z1.4@62.484,61.722 61.341,60.579 61.341,58.42 61.849,57.912 64.44,57.912 R92.2@64.567,57.785
  BottomLayer w0.406: R14.2@85.422,66.802 R21.2@85.422,64.389 85.422,64.106 C14.2@87.044,62.484 85.453,60.893 R15.2@85.453,60.574 R22.2@85.453,58.135 ; v3@85.453,56.025 R22.2@85.453,58.135 ; v3(85.471,56.007) C13.2@85.471,54.129 C13.2@85.6,54 ; R22.2@85.549,58.039 R22.2@85.453,58.135 ; TR1.2@90.297,59.309 92.456,59.309 92.583,59.182 ; TR1.7@90.297,65.659 92.456,65.659 92.583,65.532 92.583,59.182 ; v3(93.345,56.515) 92.583,57.277 92.583,59.182 ; v2@124.293,8.5 SWD1.4@129,8.5
  BottomLayer w0.508: R90.1@47.295,10.668 R91.1@47.295,9.017 47.295,3.378 48.26,2.413 U9.8@50.165,2.413 51.943,2.413 52.07,2.286 ; Z3.2@55.245,5.715 52.451,5.715 52.07,5.334 52.07,2.286 ; U8.8@64.643,2.54 64.77,2.413 64.77,1.651 ; C50.1@67.183,2.337 66.497,1.651 64.77,1.651 ; R9.1@77.597,62.865 77.597,56.896 77.978,56.515 R12.2@78.613,56.515 78.613,55.626 78.994,55.245 v2(81.661,55.245) ; v2(99.187,48.006) 99.795,47.398 C12.1@99.795,46.863 99.771,46.839 G1.4@99.771,44.196 ; v2(119.888,39.243) 120.523,39.878 R20.1@120.523,40.613 ; 52.07,2.286 52.705,1.651 58.928,1.651 64.77,1.651
  BottomLayer w0.762: v2(99.187,48.006) 103.759,52.578 ; C21.2@102.61,53.848 102.61,53.727 103.759,52.578 ; C10.1@106.502,40 106.502,41.402 106.68,41.58 v3(106.68,43.307) ; C19.2@110.285,53.848 110.285,52.656 110.363,52.578 ; L1.2@112.6,52.578 110.363,52.578 ; 103.759,52.578 110.363,52.578
  BottomLayer w1.016: L3.2@58.348,65.405 60.96,65.405 62.484,63.881 Z1.4@62.484,61.722 ; v3(75.311,21.209) 75.311,42.799 75.819,43.307 v3(75.819,49.276)
  other v2: 124.333,8.509
VC5: C45.2 C48.2 L2.2 R84.1 U7.3 | length 38.3
  TopLayer w1.016: L2.2@30.768,64.897 32.292,66.421 v4(33.655,66.421) v4@35.56,66.421 ; v4(35.687,54.61) v4(35.687,66.421)
  BottomLayer w0.508: C45.2@31.496,63.32 32.205,63.32 33.301,64.416 R84.1@34.29,64.416
  BottomLayer w1.016: C45.2@31.496,63.32 31.496,66.04 31.877,66.421 v4(33.655,66.421) v4(35.687,66.421) 36.703,65.405 36.703,63.373 37.16,62.916 U7.3@39.878,62.916 ; v4(35.687,54.61) C48.2@39.555,54.61
VX: B1.CB D1.A U3.10 ZA1.1 ZA2.1 ZA3.1 ZA4.1 ZA5.1 ZA6.1 ZA7.1 ZA8.1 ZD1.2 ZD1.4 ZD2.1 ZD2.3 ZD3.1 ZD3.3 ZD4.1 ZD4.3 | length 284.4
  TopLayer w1.016: ZA1.1@7,30 ZA2.1@20,30 ZA3.1@33,30 ZA4.1@46,30 ZA5.1@59,30 ZA6.1@72,30 ZA7.1@85,30 ZA8.1@98,30 ; B1.CB@7.5,55 4.454,55 2.794,53.34 2.794,48.895 8.001,43.688 28,43.688 ; ZD4.3@28,40 28,43.688 ; ZD4.1@35,40 35,43.688 ; ZD3.3@47,40 47,43.688 ; ZD3.1@54,40 54,43.554 53.866,43.688 ; v3(63.5,24.13) 67.437,20.193 67.437,15.367 v3(68.453,14.351) ; ZD2.3@66,40 66,43.688 66.067,43.755 ; ZD2.1@73,40 73,43.688 ; ZD1.4@84.5,40 84.5,43.688 ; ZD1.2@91.5,40 91.5,43.755 66.067,43.755 ; 28,43.688 35,43.688 ; 35,43.688 47,43.688 ; 47,43.688 53.866,43.688 ; 53.866,43.688 54.229,43.688 55.499,42.418 60.96,42.418 62.297,43.755 66.067,43.755
  BottomLayer w0.508: U3.10@70.358,11.832 70.358,13.97
  BottomLayer w1.016: D1.A@5.188,59.563 5.188,57.312 B1.CB@7.5,55 4.2,55 2.794,53.594 2.794,39.497 7,35.291 ZA1.1@7,30 ; ZA5.1@59,30 62.456,30 63.5,28.956 v3(63.5,24.13) ; v3(68.453,14.351) 69.977,14.351 70.358,13.97
pads on no net: G1.1 KEY1.0 MM1.0 MM2.0 MM3. MM4. MM6.0 MM7.0 MM8. MM9. P5.1 P6.1 P7.1 P8.1 RESET1.0 TR1.4 TR1.5 U1.1 U1.2 U1.3 U1.4 U1.5 U1.6 U1.8 U1.9 U1.13 U1.18 U1.37 U1.38 U1.39 U1.53 U1.54 U1.61 U1.62 U1.63 U1.64 U1.65 U1.66 U1.70 U1.71 U1.78 U1.95 U1.96 U1.97 U1.98 U1.101 U1.102 U2.4 U5.1 U5.5 U5.7 U5.8 U6.2 U6.6 U8.7 U9.7 ZE1.0

## Polygon pours and split planes (outlines as drawn)
AGND on TopLayer "AGND" (solid, remove dead copper, pour order 3): 70.866,0 70.866,9.525 79.121,17.78 82.423,17.78 116.205,17.78 116.205,0.508 116.713,0
GND_Z on TopLayer "GNDZ-TOP" (solid, remove dead copper, pour order 7): 0,70 0,52.578 57.277,52.578 57.277,70
GND on TopLayer "GND-TOP" (solid, remove dead copper, pour order 5): 0,70 0,0 132,0 132,70
VC3 on BottomLayer "Bottom VC3" (solid, remove dead copper, pour order 2): 123.698,20.955 123.698,33.782 123.825,33.909 110.744,33.909 110.744,20.955

## Keep-outs
KeepOutLayer:
  the board outline again, w0.254

## Silkscreen, mask and mechanical layers (free items; w line width, h text height)
TopOverlay:
  text "RESET" at 85,66 h1.14
  text "ZAS" at 55,65.5 h1.14
  text "GND" at 62,65 h1.14
  text "VC3" at 57.5,61 h1.14
  text "KEY1" at 85,60.5 h1.14
  text "TXD" at 57.5,58.5 h1.14
  text "RXD" at 57.5,56 h1.14
  text "GND" at 57.5,53.5 h1.14
  text "1" at 63.5,51.5 h1.14 r90
  text "1" at 122.555,51.435 h1.14
  text "2" at 124.714,51.435 h1.14
  text "3" at 127.381,51.435 h1.14
  text "4" at 129.921,51.435 h1.14
  text "DG1" at 24.5,44.5 h1.52
  text "DG2" at 31.5,44.5 h1.52
  text "DG3" at 43.5,44.5 h1.52
  text "DG4" at 50.5,44.5 h1.52
  text "DG5" at 62.5,44.5 h1.52
  text "DG6" at 69.5,44.5 h1.52
  text "DG7" at 81,44.5 h1.52
  text "DG8" at 88,44.5 h1.52
  text "+12" at 3,37 h2.03 r90
  text "GND" at 18.5,37 h2.03 r90
  text "e-LINE_KP" at 103.886,30.226 h3.05
  text "Elhos s.c." at 107.442,24.892 h2.03
  text "GEKA" at 112.522,21.717 h2.03
  text "2021.01.24" at 107.696,18.542 h2.03
  text "1" at 129.5,18.5 h1.14 r90
  text "AN2" at 18.654,14.731 h1.52
  text "AN7" at 82.068,14.732 h1.52
  text "AN6" at 70.445,14.68 h1.52
  text "AN8" at 96.861,14.68 h1.52
  text "AN1" at 5.167,14.553 h1.52
  text "AN3" at 31.608,14.401 h1.52
  text "AN4" at 44.608,14.401 h1.52
  text "AN3" at 57.608,14.401 h1.52
  text "LED1" at 114,13.5 h1.14
  text "LED2" at 114,11.5 h1.14
  text "SDA" at 57,10 h1.14
  text "SCL" at 57,7.5 h1.14
  text "VC3" at 57,5 h1.14
  text "1" at 52.5,3 h1.14 r90
  text "GND" at 57,2.5 h1.14
BottomOverlay:
  lines w0.2: 11.684,27.178 14.91,27.178 15.467,26.621 ; 22.678,41.783 23.644,42.748 ; 24.511,51.943 24.511,51.308 25.146,50.673 ; 24.638,50.673 25.146,50.673 ; 24.684,27.178 27.91,27.178 28.467,26.621 ; 25.146,51.181 25.146,50.673 ; 37.684,27.178 40.91,27.178 41.467,26.621 ; 53.527,9.398 55.626,9.398 ; 58.699,41.554 60.325,41.554 61.519,42.748 ; 63.684,27.178 66.91,27.178 67.467,26.621 ; 76.835,27.051 80.162,27.051 80.467,26.746 ; 95.682,24.486 101.575,24.486
Mechanical1:
  the board outline again, w0.254

## Text inside footprints (layer, text, board x,y; h text height)
TR1: BottomOverlay "1" at 90.907,56.54 h1.4 r270
U4: BottomOverlay "1" at 105.308,5.867 h1.4 r180
ZE1: TopOverlay "1" at 106.197,64.206 h1.14 r180